# EAGLE board Softgalaxy Pi HAT 2v0 (EAGLE 9.6.2)

Size 69.14 x 60.82 mm. Coordinates in mm from the lower left corner, seen from the top.
Outline: 0,0 69.14,0.13 69.14,60.82 0,60.7 0,0
Copper layers (1*16): Top 0.035mm / dielectric 1.5mm / Bottom 0.035mm
Design rules "default *": minimum track width 6mil, minimum drill 0.35mm, track to track 6mil, track to pad 6mil, pad to pad 6mil, via to via 6mil, smd to smd 0mil, copper to edge 40mil, drill to drill 6mil, minimum pad ring 10mil, minimum via ring 8mil, stop-mask expansion 4mil, vias tented up to drill 0mil, thermal gap 10mil
Net classes: 0 +5V: width 0.356 mm; 1 Power: width 0.356 mm; 2 Signals: width 0.203 mm

## Footprints (pad centres in the part's own frame; a part is rotated, then mirrored left to right if it is on the bottom)
0603 = smd 1.1 x 1: 1 -0.85,0; 2 0.85,0
SOT-223_STM = smd 0.914 x 1.6: 1 -2.3,-3.2; 2 0,-3.2; 3 2.3,-3.2
CON8_1X8_P100UM_HDR = drill 0.965 pad 1.524 square: 1 -17.78,0 | drill 0.965 pad 1.524: 2 -15.24,0; 3 -12.7,0; 4 -10.16,0; 5 -7.62,0; 6 -5.08,0; 7 -2.54,0; 8 0,0
CONN_1935174_PXC = drill 1.295 pad 1.803: 1 0,0; 2 5.004,0; 3 10.008,0
77311-101-03LF_AMP = drill 0.965 pad 1.524 square: 1 0,0 | drill 1.016 pad 1.524: 2 -2.54,0; 3 -5.08,0
CONN_10118192-0002LF_AMP = smd 0.406 x 1.346: 1 -1.3,2.204; 2 -0.65,2.204; 3 0,2.204; 4 0.65,2.204; 5 1.3,2.204 | smd 1.6 x 2.108: 6 -3.1,2.079; 7 3.1,2.079 | smd 1.905 x 1.803: 8 -3.8,-0.471; 9 3.8,-0.471 | smd 1.905 x 1.905: 10 -1.2,-0.471; 11 1.2,-0.471
SULLINS_NPTC202KFMS-RC = smd 1 x 1.56 bottom: 1 -24.13,-2.905; 2 -24.13,2.905; 3 -21.59,-2.905; 4 -21.59,2.905; 5 -19.05,-2.905; 6 -19.05,2.905; 7 -16.51,-2.905; 8 -16.51,2.905; 9 -13.97,-2.905; 10 -13.97,2.905; 11 -11.43,-2.905; 12 -11.43,2.905; 13 -8.89,-2.905; 14 -8.89,2.905; 15 -6.35,-2.905; 16 -6.35,2.905; 17 -3.81,-2.905; 18 -3.81,2.905; 19 -1.27,-2.905; 20 -1.27,2.905; 21 1.27,-2.905; 22 1.27,2.905; 23 3.81,-2.905; 24 3.81,2.905; 25 6.35,-2.905; 26 6.35,2.905; 27 8.89,-2.905; 28 8.89,2.905; 29 11.43,-2.905; 30 11.43,2.905; 31 13.97,-2.905; 32 13.97,2.905; 33 16.51,-2.905; 34 16.51,2.905; 35 19.05,-2.905; 36 19.05,2.905; 37 21.59,-2.905; 38 21.59,2.905; 39 24.13,-2.905; 40 24.13,2.905 | hole 1.02: -1.27,1.27; -3.81,1.27; -6.35,1.27; -11.43,1.27; -8.89,1.27; -13.97,1.27; -16.51,1.27; -19.05,1.27; -21.59,1.27; -24.13,1.27; 24.13,1.27; 21.59,1.27; 19.05,1.27; 13.97,1.27; 16.51,1.27; 11.43,1.27; 8.89,1.27; 6.35,1.27; 3.81,1.27; 1.27,1.27; -1.27,-1.27; -3.81,-1.27; -6.35,-1.27; -11.43,-1.27; -8.89,-1.27; -13.97,-1.27; -16.51,-1.27; -19.05,-1.27; -21.59,-1.27; -24.13,-1.27; 24.13,-1.27; 21.59,-1.27; 19.05,-1.27; 13.97,-1.27; 16.51,-1.27; 11.43,-1.27; 8.89,-1.27; 6.35,-1.27; 3.81,-1.27; 1.27,-1.27
LED_15-21SURC/S530-A3/TR8_EVE = smd 0.965 x 1.499: 1 -1.473,0; 2 1.473,0
RES_0603 = smd 0.74 x 0.93: 1 -0.795,0; 2 0.795,0
RESC2012X65N = smd 1 x 1.42: 1 -0.935,0; 2 0.935,0
SOIC18-W_MC_MCH = smd 1.981 x 0.559: 1 -4.521,5.08; 2 -4.521,3.81; 3 -4.521,2.54; 4 -4.521,1.27; 5 -4.521,0; 6 -4.521,-1.27; 7 -4.521,-2.54; 8 -4.521,-3.81; 9 -4.521,-5.08; 10 4.521,-5.08; 11 4.521,-3.81; 12 4.521,-2.54; 13 4.521,-1.27; 14 4.521,0; 15 4.521,1.27; 16 4.521,2.54; 17 4.521,3.81; 18 4.521,5.08
SOT_05CT215_NEX = smd 0.533 x 1.168: 1 -0.95,-1.016; 2 0.95,-1.016; 3 0,1.016
21-0055H_16_MXM = smd 1.46 x 0.356: 1 -2.724,2.223; 2 -2.724,1.587; 3 -2.724,0.953; 4 -2.724,0.318; 5 -2.724,-0.318; 6 -2.724,-0.953; 7 -2.724,-1.587; 8 -2.724,-2.223; 9 2.724,-2.223; 10 2.724,-1.587; 11 2.724,-0.953; 12 2.724,-0.318; 13 2.724,0.318; 14 2.724,0.953; 15 2.724,1.587; 16 2.724,2.223
21-0055Q_E16MS+1F_MXM = smd 1.6 x 0.356: 1 -2.654,2.223; 2 -2.654,1.587; 3 -2.654,0.953; 4 -2.654,0.318; 5 -2.654,-0.318; 6 -2.654,-0.953; 7 -2.654,-1.587; 8 -2.654,-2.223; 9 2.654,-2.223; 10 2.654,-1.587; 11 2.654,-0.953; 12 2.654,-0.318; 13 2.654,0.318; 14 2.654,0.953; 15 2.654,1.587; 16 2.654,2.223
B0505LS-1WR2_MNS = drill 1.092 pad 1.6: 1 0,0; 2 2.54,0; 4 7.62,0; 6 12.7,0
SOIC-16W_SIL = smd 1.9 x 0.6: 1 -4.7,4.445; 2 -4.7,3.175; 3 -4.7,1.905; 4 -4.7,0.635; 5 -4.7,-0.635; 6 -4.7,-1.905; 7 -4.7,-3.175; 8 -4.7,-4.445; 9 4.7,-4.445; 10 4.7,-3.175; 11 4.7,-1.905; 12 4.7,-0.635; 13 4.7,0.635; 14 4.7,1.905; 15 4.7,3.175; 16 4.7,4.445
DGS0010A_N = smd 1.35 x 0.3: 1 -2.225,1; 2 -2.225,0.5; 3 -2.225,0; 4 -2.225,-0.5; 5 -2.225,-1; 6 2.225,-1; 7 2.225,-0.5; 8 2.225,0; 9 2.225,0.5; 10 2.225,1
D8 = smd 1.981 x 0.559: 1 -2.464,1.905; 2 -2.464,0.635; 3 -2.464,-0.635; 4 -2.464,-1.905; 5 2.464,-1.905; 6 2.464,-0.635; 7 2.464,0.635; 8 2.464,1.905
SOIC16-N_MC_MCH = smd 1.981 x 0.559: 1 -2.362,4.445; 2 -2.362,3.175; 3 -2.362,1.905; 4 -2.362,0.635; 5 -2.362,-0.635; 6 -2.362,-1.905; 7 -2.362,-3.175; 8 -2.362,-4.445; 9 2.362,-4.445; 10 2.362,-3.175; 11 2.362,-1.905; 12 2.362,-0.635; 13 2.362,0.635; 14 2.362,1.905; 15 2.362,3.175; 16 2.362,4.445
SOT23-3_SM24CANB-02HTG_LTF = smd 0.559 x 1.245: 1 -0.953,-1.054; 2 0.953,-1.054; 3 0,1.054
RASPI_BOARD_B+_FULL_PAD = drill 1 pad 1.778 square: 1 8.37,51.23 | drill 1 pad 1.778: 2 8.37,53.77; 3 10.91,51.23; 4 10.91,53.77; 5 13.45,51.23; 6 13.45,53.77; 7 15.99,51.23; 8 15.99,53.77; 9 18.53,51.23; 10 18.53,53.77; 11 21.07,51.23; 12 21.07,53.77; 13 23.61,51.23; 14 23.61,53.77; 15 26.15,51.23; 16 26.15,53.77; 17 28.69,51.23; 18 28.69,53.77; 19 31.23,51.23; 20 31.23,53.77; 21 33.77,51.23; 22 33.77,53.77; 23 36.31,51.23; 24 36.31,53.77; 25 38.85,51.23; 26 38.85,53.77; 27 41.39,51.23; 28 41.39,53.77; 29 43.93,51.23; 30 43.93,53.77; 31 46.47,51.23; 32 46.47,53.77; 33 49.01,51.23; 34 49.01,53.77; 35 51.55,51.23; 36 51.55,53.77; 37 54.09,51.23; 38 54.09,53.77; 39 56.63,51.23; 40 56.63,53.77 | drill 2.75 pad 6.2: DRILL_1 3.5,52.5; DRILL_2 61.5,52.5; DRILL_3 3.5,3.5; DRILL_4 61.5,3.5
TSX-3225_16.0000MF18X-AC6_EPS = smd 1.448 x 1.346: 1 -0.956,1.1; 2 -0.956,-1.1; 3 0.956,-1.1; 4 0.956,1.1

## Placement (x,y rotation side)
C2  10nF  [0603]  49.53,40.64 90 bottom
C3  10nF  [0603]  49.53,26.42 90 bottom
C4  10nF  [0603]  58.29,22.99 270 top
C5  10nF  [0603]  33.02,22.86 270 top
CR1  LD1117S33CTR  [SOT-223_STM]  34.29,41.91 0 bottom
CR2  LD1117S50CTR  [SOT-223_STM]  17.78,36.83 90 bottom
CR3  LD1117S33CTR  [SOT-223_STM]  39.37,21.59 180 top
J1  828214-8  [CON8_1X8_P100UM_HDR]  3.81,30.48 90 top
J2  1935174  [CONN_1935174_PXC]  8.89,35.56 90 top
J3  828214-8  [CON8_1X8_P100UM_HDR]  7.62,30.48 90 top
J4  77311-101-03LF  [77311-101-03LF_AMP]  63.5,15.24 0 top
J5  1935174  [CONN_1935174_PXC]  45.72,7.62 0 top
J6  77311-101-03LF  [77311-101-03LF_AMP]  40.64,5.08 270 top
J7  77311-101-03LF  [77311-101-03LF_AMP]  36.83,15.24 0 top
J8  1935174  [CONN_1935174_PXC]  20.32,7.62 0 top
J9  77311-101-03LF  [77311-101-03LF_AMP]  13.97,3.81 270 top
J10  10118192-0002LF  [CONN_10118192-0002LF_AMP]  3.81,40.64 90 bottom
J11  828214-8  [CON8_1X8_P100UM_HDR]  63.5,29.21 270 top
J13  NPTC202KFMS-RC  [SULLINS_NPTC202KFMS-RC]  33.78,54.99 0 top
LED1  15-21SURC/S530-A3/TR8  [LED_15-21SURC/S530-A3/TR8_EVE]  8.13,49.4 0 top
R1  4.7k  [0603]  13.08,49.28 0 top
R2  10k  [0603]  54.23,33.53 270 top
R3  RC0603JR-070RL  [RES_0603]  49.53,31.75 0 top
R4  RC0603JR-070RL  [RES_0603]  49.53,34.29 0 top
R5  10k  [0603]  11.43,31.75 0 bottom
R6  10k  [0603]  11.43,29.21 0 bottom
R7  10k  [0603]  15.24,29.21 270 bottom
R8  10k  [0603]  15.24,26.67 0 bottom
R9  10k  [0603]  19.43,31.75 0 bottom
R10  10k  [0603]  29.34,29.08 0 bottom
R11  10k  [0603]  27.94,26.67 180 bottom
R12  10k  [0603]  19.05,29.21 0 bottom
R13  1k  [0603]  49.53,16.51 270 top
R14  1k  [0603]  28.07,16.76 270 top
R15  CRGCQ0805F120R  [RESC2012X65N]  53.34,16.51 90 top
R16  CRGCQ0805F120R  [RESC2012X65N]  25.15,16.76 270 top
R17  10k  [0603]  35.56,33.02 0 top
R18  RC0603JR-070RL  [RES_0603]  29.21,34.29 0 top
R19  RC0603JR-070RL  [RES_0603]  29.21,31.75 0 top
U1  MCP2515T-I/SO  [SOIC18-W_MC_MCH]  53.34,41.91 270 top
U2  PMEG2005CT,215  [SOT_05CT215_NEX]  17.4,47.88 90 bottom
U3  MAX14850AEE+  [21-0055H_16_MXM]  29.21,34.29 270 bottom
U4  MAX14431CAEE+  [21-0055Q_E16MS+1F_MXM]  41.91,34.29 270 bottom
U5  B0505LS-1WR2  [B0505LS-1WR2_MNS]  46.99,29.21 180 top
U6  SI8642ED-B-IS  [SOIC-16W_SIL]  55.88,33.02 270 bottom
U7  ADS1115IDGST  [DGS0010A_N]  15.24,29.21 0 top
U8  SN65HVD230QDG4Q1  [D8]  52.07,22.86 270 top
U9  SN65HVD230QDG4Q1  [D8]  26.67,22.86 270 top
U10  MCP3008T-I/SL  [SOIC16-N_MC_MCH]  15.24,20.32 0 top
U11  ADS1015IDGSR  [DGS0010A_N]  22.86,29.21 0 top
U12  SM24CANB-02HTG  [SOT23-3_SM24CANB-02HTG_LTF]  45.72,15.24 0 top
U13  SM24CANB-02HTG  [SOT23-3_SM24CANB-02HTG_LTF]  20.32,15.24 0 top
U14  PMEG2005CT,215  [SOT_05CT215_NEX]  16.51,43.18 0 bottom
U15  MCP2515T-I/SO  [SOIC18-W_MC_MCH]  33.02,41.91 270 top
X1  RASPI_BOARD_B+#_FP  [RASPI_BOARD_B+_FULL_PAD]  1.27,2.54 0 top
XTAL1  TSX-3225_16.0000MF18X-AC6  [TSX-3225_16.0000MF18X-AC6_EPS]  44.45,46.99 270 top
XTAL2  TSX-3225_16.0000MF18X-AC6  [TSX-3225_16.0000MF18X-AC6_EPS]  22.86,46.99 270 top

## Library data of the parts
C2-C5 = SparkFun-Capacitors; PROD_ID: CAP-00867
CR1 CR3 = Softgalaxy Pi HAT Lib-Eagle; COPYRIGHT: Copyright (C) 2021 Ultra Librarian. All rights reserved.; MANUFACTURER_PART_NUMBER: LD1117S33CTR; MFR_NAME: STMicroelectronics
CR2 = Softgalaxy Pi HAT Lib-Eagle; COPYRIGHT: Copyright (C) 2021 Ultra Librarian. All rights reserved.; DIGI-KEY_PART_NUMBER_1: 497-1243-1-ND; DIGI-KEY_PART_NUMBER_2: 497-1243-2-ND; DIGI-KEY_PART_NUMBER_3: 497-1243-6-ND; MANUFACTURER_PART_NUMBER: LD1117S50CTR; MFR_NAME: STMicroelectronics
J1 J3 J11 = Softgalaxy Pi HAT Lib-Eagle; COPYRIGHT: Copyright (C) 2021 Ultra Librarian. All rights reserved.; MANUFACTURER_PART_NUMBER: 828214-8; MFR_NAME: TE Connectivity
J2 J5 J8 = Softgalaxy Pi HAT Lib-Eagle; COPYRIGHT: Copyright (C) 2021 Ultra Librarian. All rights reserved.; DIGI-KEY_PART_NUMBER_1: 277-1578-ND; MANUFACTURER_PART_NUMBER: 1935174; MFR_NAME: Phoenix Contact
J4 J6 J7 J9 = Softgalaxy Pi HAT Lib-Eagle; COPYRIGHT: Copyright (C) 2021 Ultra Librarian. All rights reserved.; MANUFACTURER_PART_NUMBER: 77311-101-03LF; MFR_NAME: Amphenol ICC
J10 = Softgalaxy Pi HAT Lib-Eagle; COPYRIGHT: Copyright (C) 2021 Ultra Librarian. All rights reserved.; DIGI-KEY_PART_NUMBER_1: 609-5379-2-ND; DIGI-KEY_PART_NUMBER_2: 609-5379-1-ND; DIGI-KEY_PART_NUMBER_3: 609-5379-6-ND; MANUFACTURER_PART_NUMBER: 10118192-0002LF; MFR_NAME: Amphenol ICC
J13 = NPTC202KFMS-RC_Bottom_Layer_Footprint_Modified for Pi; DESCRIPTION: 40 Position Header Connector 0.100 (2.54mm) Surface Mount Tin; DIGI-KEY_PART_NUMBER: S5690-ND; MF: Sullins Connector; MP: NPTC202KFMS-RC; PACKAGE: None
LED1 = Softgalaxy Pi HAT Lib-Eagle; COPYRIGHT: Copyright (C) 2021 Ultra Librarian. All rights reserved.; MANUFACTURER_PART_NUMBER: 15-21SURC/S530-A3/TR8; MFR_NAME: Everlight
R1 = SparkFun-Resistors; PROD_ID: RES-07857
R2 R5-R12 R17 = SparkFun-Resistors; PROD_ID: RES-00824
R3 R4 R18 R19 = Resistor_Capacitor; CREATED_BY: PCBLayout.com; DIGIKEY_PART_NUMBER: 311-0.0GRTR-ND; MANUFACTURER: Yageo; MPN: RC0603JR-070RL; PACKAGE: SMD 0603
R13 R14 = SparkFun-Resistors; PROD_ID: RES-07856
R15 R16 = Softgalaxy Pi HAT Lib-Eagle; COMMENT: 1-2176341-4; DESCRIPTION: Fixed Resistor CRGCQ 0805 120R 1%; DIGI-KEY_PART_NUMBER: A129738CT-ND; MF: TE Connectivity; MP: CRGCQ0805F120R; PACKAGE: 2012 TE Connectivity; PURCHASE-URL: https://pricing.snapeda.com/search/part/CRGCQ0805F120R/?ref=eda
U1 U15 = Softgalaxy Pi HAT Lib-Eagle; COPYRIGHT: Copyright (C) 2021 Ultra Librarian. All rights reserved.; DIGI-KEY_PART_NUMBER_1: MCP2515T-I/SOCT-ND; DIGI-KEY_PART_NUMBER_2: MCP2515T-I/SODKR-ND; DIGI-KEY_PART_NUMBER_3: MCP2515T-I/SOTR-ND; MANUFACTURER_PART_NUMBER: MCP2515T-I/SO; MFR_NAME: Microchip
U2 U14 = Softgalaxy Pi HAT Lib-Eagle; COPYRIGHT: Copyright (C) 2021 Ultra Librarian. All rights reserved.; DIGI-KEY_PART_NUMBER_1: 1727-5188-2-ND; DIGI-KEY_PART_NUMBER_2: 1727-5188-1-ND; DIGI-KEY_PART_NUMBER_3: 1727-5188-6-ND; DIGI-KEY_PART_NUMBER_4: 954-PMEG2005CT215-CHP; MANUFACTURER_PART_NUMBER: PMEG2005CT,215; MFR_NAME: Nexperia
U3 = Softgalaxy Pi HAT Lib-Eagle; COPYRIGHT: Copyright (C) 2021 Ultra Librarian. All rights reserved.; DIGI-KEY_PART_NUMBER_1: MAX14850AEE+-ND; MANUFACTURER_PART_NUMBER: MAX14850AEE+; MFR_NAME: Maxim Integrated Products
U4 = Softgalaxy Pi HAT Lib-Eagle; COPYRIGHT: Copyright (C) 2021 Ultra Librarian. All rights reserved.; DIGI-KEY_PART_NUMBER_1: 175-MAX14431CAEE+-ND; MANUFACTURER_PART_NUMBER: MAX14431CAEE+; MFR_NAME: Maxim Integrated Products
U5 = Softgalaxy Pi HAT Lib-Eagle; COPYRIGHT: Copyright (C) 2021 Ultra Librarian. All rights reserved.; MANUFACTURER_PART_NUMBER: B0505LS-1WR2; MFR_NAME: MORNSUN
U6 = Softgalaxy Pi HAT Lib-Eagle; COPYRIGHT: Copyright (C) 2021 Ultra Librarian. All rights reserved.; MANUFACTURER_PART_NUMBER: SI8642ED-B-IS; MFR_NAME: Silicon Labs
U7 = ADS1115; COPYRIGHT: Copyright (C) 2021 Ultra Librarian. All rights reserved.; MANUFACTURER_PART_NUMBER: ADS1115IDGST; MFR_NAME: Texas Instruments; REFDES: RefDes; TYPE: TYPE
U8 U9 = Softgalaxy Pi HAT Lib-Eagle; COPYRIGHT: Copyright (C) 2021 Ultra Librarian. All rights reserved.; MANUFACTURER_PART_NUMBER: SN65HVD230QDG4Q1; MFR_NAME: Texas Instruments
U10 = MCP3008; COPYRIGHT: Copyright (C) 2021 Ultra Librarian. All rights reserved.; MANUFACTURER_PART_NUMBER: MCP3008T-I/SL; MFR_NAME: Microchip
U11 = ADS1015; COPYRIGHT: Copyright (C) 2021 Ultra Librarian. All rights reserved.; MANUFACTURER_PART_NUMBER: ADS1015IDGSR; MFR_NAME: Texas Instruments; REFDES: RefDes; TYPE: TYPE
U12 U13 = Softgalaxy Pi HAT Lib-Eagle; COPYRIGHT: Copyright (C) 2021 Ultra Librarian. All rights reserved.; MANUFACTURER_PART_NUMBER: SM24CANB-02HTG; MFR_NAME: Littelfuse Inc
X1 = raspberrypi_bastelstube_v13
XTAL1 XTAL2 = Softgalaxy Pi HAT Lib-Eagle; COPYRIGHT: Copyright (C) 2021 Ultra Librarian. All rights reserved.; DIGI-KEY_PART_NUMBER_1: SER4372TR-ND; DIGI-KEY_PART_NUMBER_2: SER4372CT-ND; DIGI-KEY_PART_NUMBER_3: SER4372DKR-ND; MANUFACTURER_PART_NUMBER: TSX-3225 16.0000MF18X-AC6; MFR_NAME: Epson

## Nets
+3V3 [Power]: C2.1 CR1.2 R2.1 R17.1 U1.18 U3.1 U4.1 U6.1 U15.18
+5V [Power]: J13.2 J13.4 R1.2 U14.1 X1.2 X1.4
CAN0_INT [Signals]: R3.2 R4.2 U1.12
CAN1_INT [Signals]: R18.2 R19.2 U15.12
GND: C2.2 CR1.1 CR2.1 J2.3 J10.5 J10.6 J10.7 J10.8 J10.9 J10.10 J10.11 J11.1 J13.6 J13.9 J13.14 J13.20 J13.25 J13.30 J13.34 J13.39 LED1.1 U1.9 U3.8 U4.8 U5.2 U6.2 U6.8 U15.9 X1.6 X1.9 X1.14 X1.20 X1.25 X1.30 X1.34 X1.39 XTAL1.2 XTAL1.4 XTAL2.2 XTAL2.4
GNDA: C4.2 C5.2 CR3.1 J1.1 J1.2 J1.3 J1.4 J1.5 J1.6 J1.7 J1.8 J5.3 J6.3 J8.3 J9.3 R12.2 R13.2 R14.2 U3.9 U4.9 U5.4 U6.9 U7.3 U8.2 U9.2 U10.9 U10.14 U11.3 U12.3 U13.3
N$1 [Signals]: U1.7 XTAL1.1
N$2 [Signals]: U1.8 XTAL1.3
N$3 [Signals]: J10.1 U14.2
N$4 [Signals]: U2.1 U14.3
N$5 [Signals]: R2.2 U1.17
N$6 [Signals]: LED1.2 R1.1
N$7 [Signals]: C3.2 U6.16
N$8 [Signals]: U8.1
N$9 [Signals]: J4.2 R15.2
N$10 [Signals]: U9.1
N$11 [Signals]: U8.4
N$12 [Signals]: R13.1 U8.8
N$13 [Signals]: J5.1 J6.1 R15.1 U8.7 U12.2
N$14 [Signals]: J4.3 J5.2 J6.2 U8.6 U12.1
N$15 [Signals]: U8.5
N$16 [Signals]: U9.4
N$17 [Signals]: R14.1 U9.8
N$18 [Signals]: J8.1 J9.1 R16.1 U9.7 U13.2
N$19 [Signals]: J7.3 J8.2 J9.2 U9.6 U13.1
N$20 [Signals]: U9.5
N$21 [Signals]: J7.2 R16.2
N$22 [Signals]: U4.3
N$23 [Signals]: U4.4
N$24 [Signals]: U4.5
N$25 [Signals]: U4.6
N$26 [Signals]: U3.2
N$27 [Signals]: U3.6
N$28 [Signals]: U4.15
N$29 [Signals]: U4.11 U10.12
N$30 [Signals]: U4.13 U10.11
N$31 [Signals]: U4.12 U10.10
N$32 [Signals]: CR2.3 U2.3
N$33 [Signals]: U4.10
N$34 [Signals]: R8.1 R10.1 U3.15 U7.10 U11.10
N$35 [Signals]: U3.14
N$36 [Signals]: U3.13
N$37 [Signals]: U3.12
N$38 [Signals]: R7.1 R11.1 U3.11 U7.9 U11.9
N$39 [Signals]: U3.10
N$40 [Signals]: R12.1 U11.1
N$41 [Signals]: J2.1 U2.2
N$42 [Signals]: J3.1 U10.8
N$43 [Signals]: R9.2 U11.2
N$44 [Signals]: J3.2 U10.7
N$45 [Signals]: J3.3 U10.6
N$46 [Signals]: R6.1 U7.1
N$47 [Signals]: R5.1 U7.2
N$48 [Signals]: J3.4 U10.5
N$49 [Signals]: J3.5 U7.7 U10.4 U11.7
N$50 [Signals]: J3.6 U7.6 U10.3 U11.6
N$51 [Signals]: J3.7 U7.5 U10.2 U11.5
N$52 [Signals]: J3.8 U7.4 U10.1 U11.4
N$53 [Signals]: U4.14 U10.13
N$54 [Signals]: CR3.3 U5.6
N$55 [Signals]: R17.2 U15.17
N$56 [Signals]: U15.8 XTAL2.3
N$57 [Signals]: U15.7 XTAL2.1
N$58 [Signals]: U6.4 U15.1
N$64 [Signals]: J11.3
N$65 [Signals]: J11.2
PI_GPIO04 [Signals]: J13.7 X1.7
PI_GPIO05 [Signals]: J13.29 X1.29
PI_GPIO06 [Signals]: J13.31 X1.31
PI_GPIO12 [Signals]: J13.32 X1.32
PI_GPIO13 [Signals]: J13.33 X1.33
PI_GPIO16 [Signals]: J13.36 X1.36
PI_GPIO17 [Signals]: J13.11 X1.11
PI_GPIO18 [Signals]: J13.12 X1.12
PI_GPIO19 [Signals]: J13.35 X1.35
PI_GPIO20 [Signals]: J13.38 X1.38
PI_GPIO21 [Signals]: J13.40 X1.40
PI_GPIO22 [Signals]: J13.15 R4.1 X1.15
PI_GPIO23 [Signals]: J13.16 R3.1 X1.16
PI_GPIO24 [Signals]: J13.18 R19.1 X1.18
PI_GPIO25 [Signals]: J13.22 R18.1 X1.22
PI_GPIO26 [Signals]: J13.37 X1.37
PI_GPIO27 [Signals]: J13.13 X1.13
PI_RXD [Signals]: J13.10 X1.10
PI_SC [Signals]: J13.28 X1.28
PI_SCL [Signals]: J13.5 X1.5
PI_SD [Signals]: J13.27 X1.27
PI_SDA [Signals]: J13.3 X1.3
PI_TXD [Signals]: J13.8 X1.8
RXD0 [Signals]: U1.2 U6.5
RXD0B [Signals]: U6.12
RXD1 [Signals]: U6.6 U15.2
RXD1B [Signals]: U6.11
SPI0_CE0 [Signals]: J11.5 J13.24 U1.16 X1.24
SPI0_CE1 [Signals]: J11.4 J13.26 U15.16 X1.26
SPI0_MISO [Signals]: J11.7 J13.21 U1.15 U15.15 X1.21
SPI0_MOSI [Signals]: J11.8 J13.19 U1.14 U15.14 X1.19
SPI0_SCK [Signals]: J11.6 J13.23 U1.13 U15.13 X1.23
TXD0 [Signals]: U1.1 U6.3
TXD0B [Signals]: U6.14
TXD1B [Signals]: U6.13
V+ [Power]: C3.1 C4.1 C5.1 CR3.2 R5.2 R6.2 R7.2 R8.2 R9.1 R10.2 R11.2 U3.16 U4.16 U7.8 U8.3 U9.3 U10.15 U10.16 U11.8
VCC: CR1.3 CR2.2 U5.1
VDD [Power]: J13.1 J13.17 X1.1 X1.17

## Tracks (layer width: path | path; a pad name or v marks a point on that pad's centre or on a via)
+3V3  (8 unrouted)
+5V  (5 unrouted)
CAN0_INT  (2 unrouted)
CAN1_INT  (2 unrouted)
GND  (39 unrouted)
GNDA  (29 unrouted)
N$1  (1 unrouted)
N$2  (1 unrouted)
N$3  (1 unrouted)
N$4  (1 unrouted)
N$5  (1 unrouted)
N$6  (1 unrouted)
N$7  (1 unrouted)
N$9  (1 unrouted)
N$12  (1 unrouted)
N$13  (4 unrouted)
N$14  (4 unrouted)
N$17  (1 unrouted)
N$18  (4 unrouted)
N$19  (4 unrouted)
N$21  (1 unrouted)
N$29  (1 unrouted)
N$30  (1 unrouted)
N$31  (1 unrouted)
N$32  (1 unrouted)
N$34  (4 unrouted)
N$38  (4 unrouted)
N$40  (1 unrouted)
N$41  (1 unrouted)
N$42  (1 unrouted)
N$43  (1 unrouted)
N$44  (1 unrouted)
N$45  (1 unrouted)
N$46  (1 unrouted)
N$47  (1 unrouted)
N$48  (1 unrouted)
N$49  (3 unrouted)
N$50  (3 unrouted)
N$51  (3 unrouted)
N$52  (3 unrouted)
N$53  (1 unrouted)
N$54  (1 unrouted)
N$55  (1 unrouted)
N$56  (1 unrouted)
N$57  (1 unrouted)
N$58  (1 unrouted)
PI_GPIO04  (1 unrouted)
PI_GPIO05  (1 unrouted)
PI_GPIO06  (1 unrouted)
PI_GPIO12  (1 unrouted)
PI_GPIO13  (1 unrouted)
PI_GPIO16  (1 unrouted)
PI_GPIO17  (1 unrouted)
PI_GPIO18  (1 unrouted)
PI_GPIO19  (1 unrouted)
PI_GPIO20  (1 unrouted)
PI_GPIO21  (1 unrouted)
PI_GPIO22  (2 unrouted)
PI_GPIO23  (2 unrouted)
PI_GPIO24  (2 unrouted)
PI_GPIO25  (2 unrouted)
PI_GPIO26  (1 unrouted)
PI_GPIO27  (1 unrouted)
PI_RXD  (1 unrouted)
PI_SC  (1 unrouted)
PI_SCL  (1 unrouted)
PI_SD  (1 unrouted)
PI_SDA  (1 unrouted)
PI_TXD  (1 unrouted)
RXD0  (1 unrouted)
RXD1  (1 unrouted)
SPI0_CE0  (3 unrouted)
SPI0_CE1  (3 unrouted)
SPI0_MISO  (4 unrouted)
SPI0_MOSI  (4 unrouted)
SPI0_SCK  (4 unrouted)
TXD0  (1 unrouted)
V+  (18 unrouted)
VCC  (2 unrouted)
VDD  (3 unrouted)